# Altium PCB PCB EN 15.PcbDoc
Units mm, origin at the board's own origin, x right, y up, seen from the top; angles counter-clockwise.
Board outline 60 x 50 mm, 2 copper layers (Top Layer, Bottom Layer); 21 components, 10 nets, 49 pads, 0 vias.
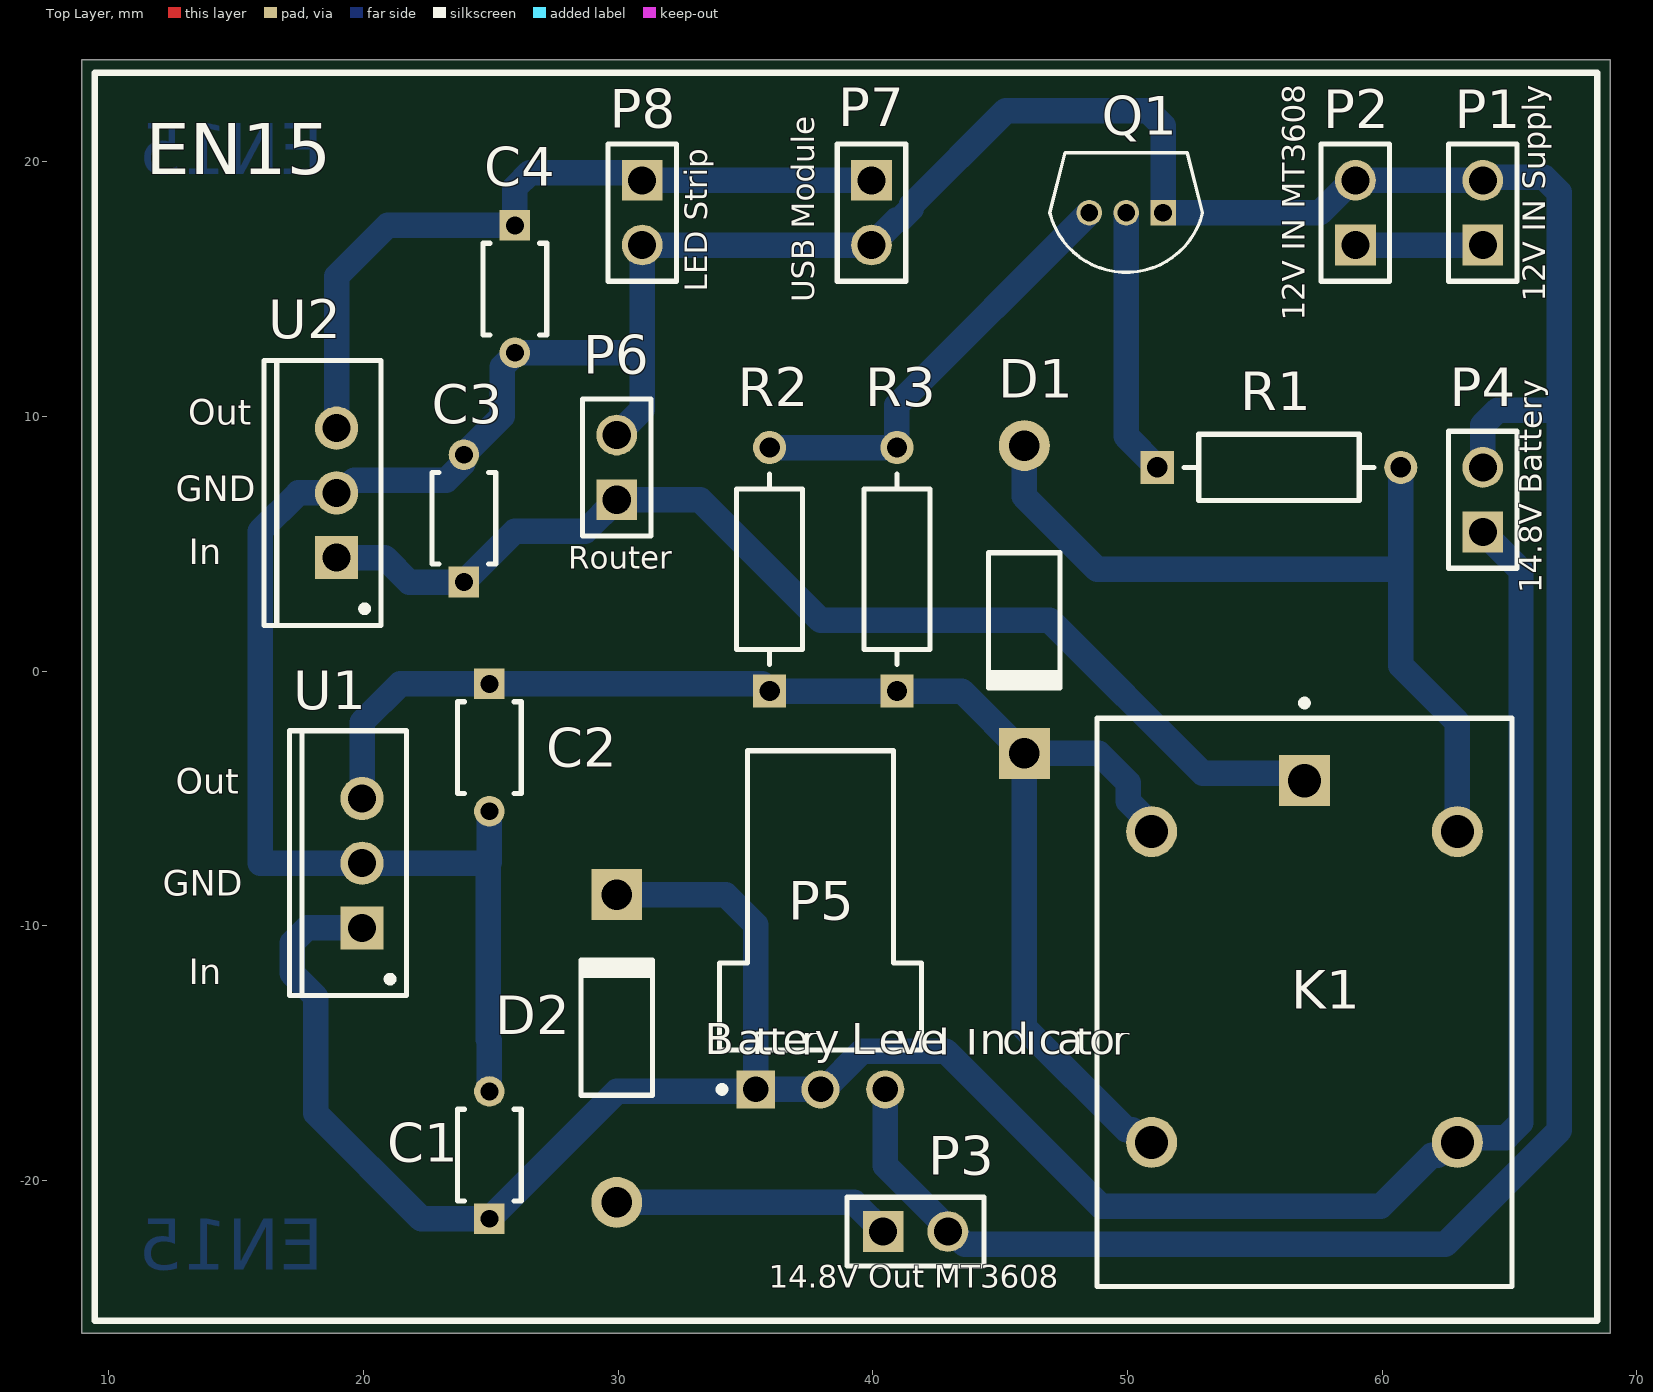
[diagram p0: Top Layer view]
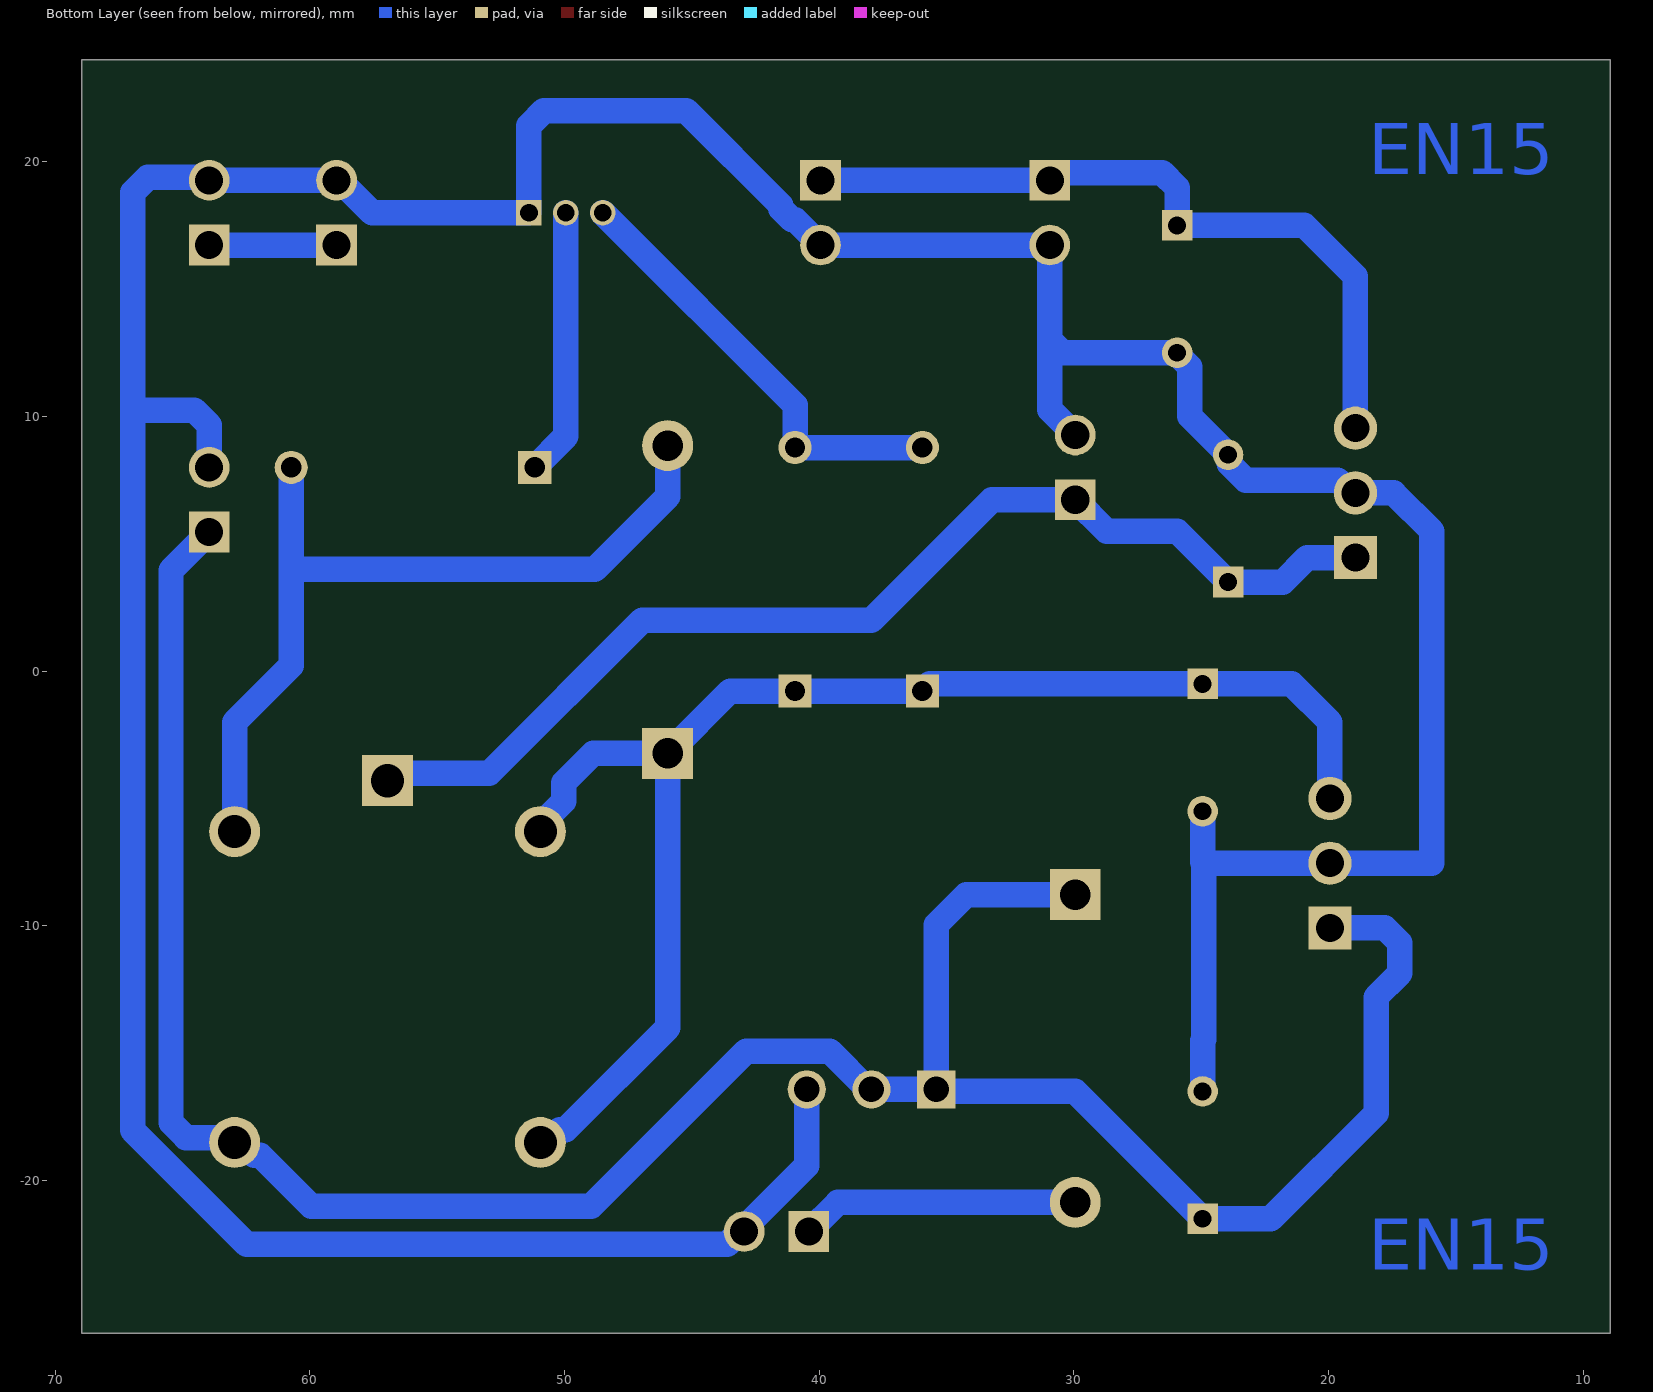
[diagram p1: Bottom Layer view, seen from below]
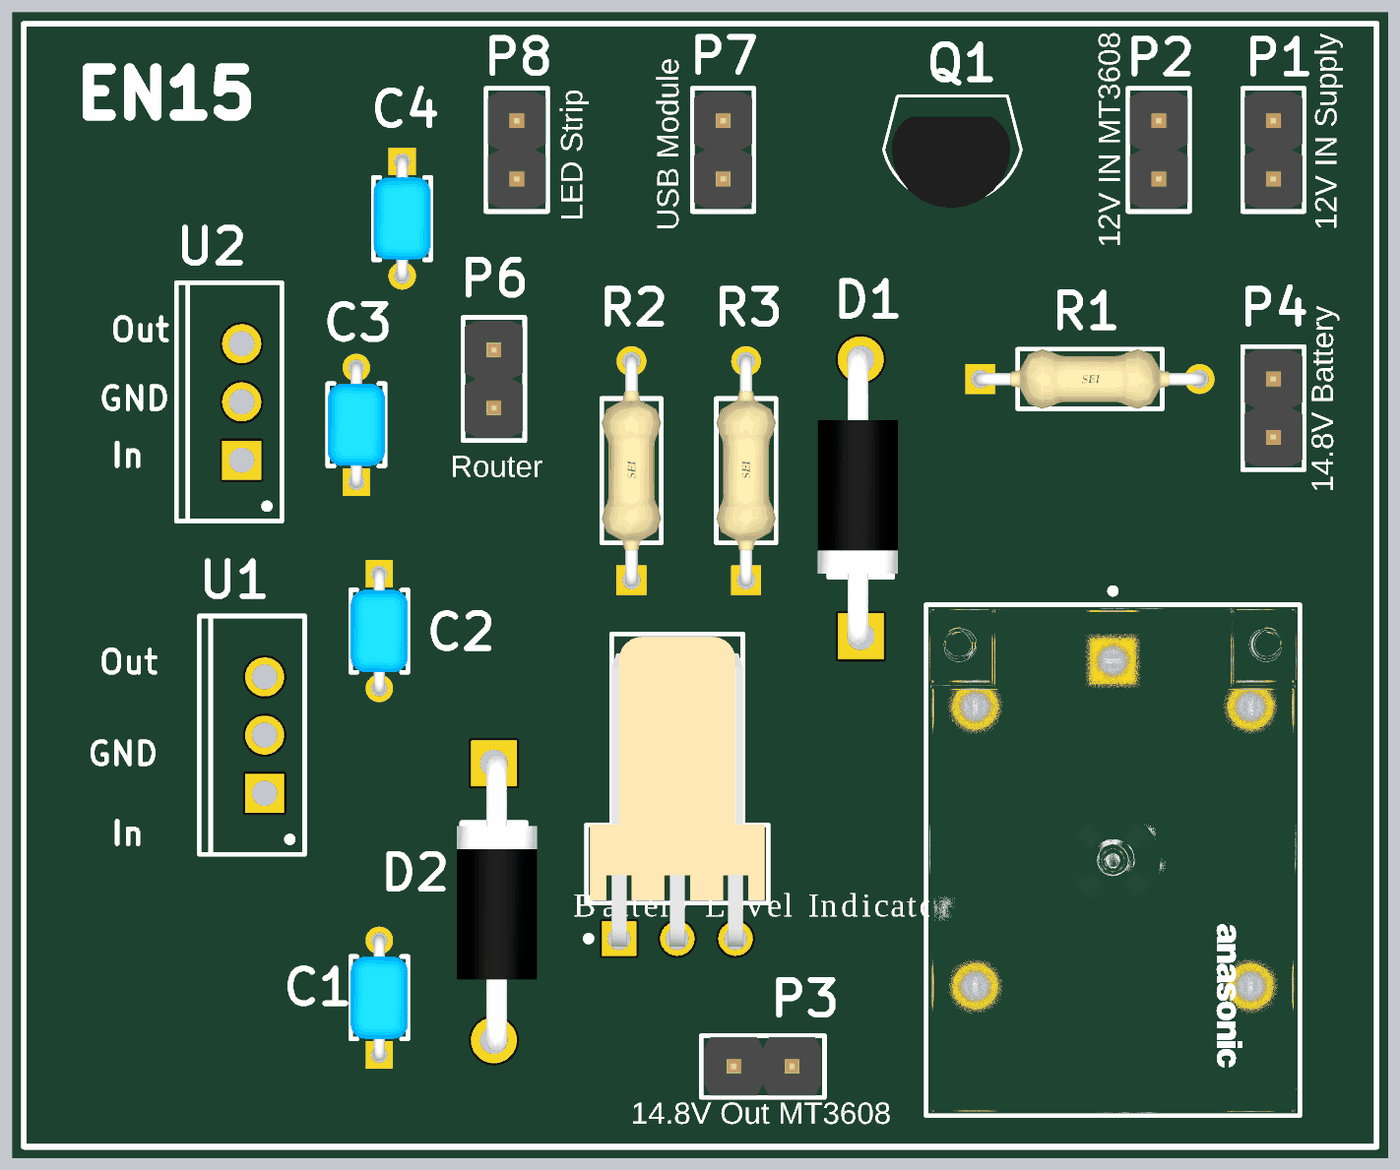
[diagram p2: 3D render of the assembled board from above, using the file's embedded part models]

## Layer stack, top to bottom
Top Solder: solder mask 0.0102, Solder Resist, Dk 3.5
Top Layer: signal copper 0.0356
Dielectric 1: dielectric 0.32, FR-4, Dk 4.8
Bottom Layer: signal copper 0.0356
Bottom Solder: solder mask 0.0102, Solder Resist, Dk 3.5

## Board outline
8.95,-26 68.95,-26 68.95,24 8.95,24

## Design rules (kind name [scope] priority, off if disabled: settings)
Clearance [All] p1: gap=0.254 ignorepadtopadclearanceinfootprint=FALSE except(0: Arc-Hole Track-Hole SMDPad-Hole THPad-Hole Via-Hole Fill-Hole Poly-Hole Region-Hole Text-Hole)
MinimumSolderMaskSliver [All] p1: minsoldermaskwidth=0.1
PolygonConnect [All] p1: connectstyle=Relief reliefconductorwidth=0.254 reliefentries=4 polygonreliefangle="90 Angle" airgapwidth=0.254
RoutingVias [All] p1: holewidth=0.711 width=1.27 viastyle="Through Hole" minholewidth=0.711 minwidth=1.27 maxholewidth=0.711 maxwidth=1.27
SolderMaskExpansion [All] p1: expansion=0.102 istentingtop=FALSE
Width [All] p1: maxlimit=2 minlimit=0.254 preferedwidth=0.254
29 further rules are at their usual default settings.

## Components (designator, comment, footprint, x,y, rotation, side; value= is the part's Value field where it differs from the comment)
C1 "104" FP-RCE0K1-MFG 24.95,-19 r90 top
C2 "104" FP-RCE0K1-MFG 24.95,-3 r270 top
C3 "104" FP-RCE0K1-MFG 23.95,6 r90 top
C4 "104" FP-RCE0K1-MFG 25.95,15 r270 top
D1 "Diode 1N4001" DO-41 45.95,2 r270 top
D2 "Diode 1N4001" DO-41 29.95,-14 r90 top
K1 "Relay" FP-JS1-5V-F-MFG 56.95,-13 r270 top
P1 "12V IN Supply" 61300211121 63.95,18 r90 top
P2 "12V IN MT3608" 61300211121 58.95,18 r90 top
P3 "14.8V Out MT3608" 61300211121 41.68,-22 r0 top
P4 "14.8V Battery" 61300211121 63.95,6.73 r90 top
P5 "Battery Level Indicator" 61900319521 37.95,-9 r180 top
P6 "Router" 61300211121 29.95,8 r90 top
P7 "USB Module" 61300211121 39.95,18 r270 top
P8 "LED Strip" 61300211121 30.95,18 r270 top
Q1 "2SD400" TO145P470X600X850-3P 49.95,18 r270 top
R1 "PCF14JT7K50" FP-CF14-MFG 55.95,8 r0 top
R2 "PCF14JT7K50" FP-CF14-MFG 35.95,4 r90 top
R3 "PCF14JT7K50" FP-CF14-MFG 40.95,4 r90 top
U1 "L7812CV" TO220 19.95,-7.54 r90 top
U2 "L7805CV" TO220 18.95,7 r90 top

## Footprints (in the part's own frame and the unit in brackets; to place one, negate y for a bottom-side part, rotate by r counter-clockwise, add the part's x,y. Pads: shape width x height; smd on the part's side, far side on the other; paste and mask are expansions set on the pad)
61300211121 [mm] "Pin Header, pitch 2.54 mm, THT, Vertical, single row, 2p"
  rect 1.6x1.6 hole 1.1: 1(-1.27,0)
  round 1.6 hole 1.1: 2(1.27,0)
  silkscreen extent -2.69,-1.35 2.69,1.35, body extent -2.54,-1.27 2.54,1.27, height 8.57
61900319521 [mm] "2.54mm Male Right Angled Locking Header Top Locking, 3p"
  rect 1.5x1.5 hole 1: 1(2.54,7.42)
  round 1.5 hole 1: 2(0,7.42) 3(-2.54,7.42)
  silkscreen extent -3.96,-5.87 3.99,7.54, body extent -3.81,-5.75 3.81,7.77, height 5.83
DO-41 [mm] "Diode, Axial; Body 5.2 x 2.7 mm (LxDia. max), Lead Dia. 0.86 mm (max)"
  round 2 hole 1.2: 1(-6.858,0)
  rect 2x2 hole 1.2: 2(5.23,0)
  silkscreen extent -2.65,-1.4 2.75,1.4, body extent -7.31,-1.88 5.59,1.62, height 3.75
FP-CF14-MFG [mm]
  rect 1.3x1.3 hole 0.8 paste-1000 mask+0: 1(-4.78,0)
  round 1.3 hole 0.8 paste-1000 mask+0: 2(4.78,0)
  silkscreen extent -3.73,-1.3 3.73,1.3, body extent -5.53,-1.4 5.53,1.4, height 0.25
FP-JS1-5V-F-MFG [mm]
  rect 2x2 hole 1.3 paste-1000 mask+0: 1(-8.7,0)
  round 2 hole 1.3 paste-1000 mask+0: 2(-6.7,-6) 3(5.5,-6) 4(5.5,6) 5(-6.7,6)
  silkscreen extent -11.87,-8.15 11.15,8.15, body extent -11.25,-8.25 11.25,8.25, height 0.25
FP-RCE0K1-MFG [mm]
  rect 1.2x1.2 hole 0.7 paste-1000 mask+0: 1(-2.5,0)
  round 1.2 hole 0.7 paste-1000 mask+0: 2(2.5,0)
  silkscreen extent -1.8,-1.25 1.8,1.25, body extent -3.2,-1.35 3.2,1.35, height 0.25
TO145P470X600X850-3P [mm]
  rect 1x1 hole 0.7: 1(0,1.45)
  round 1 hole 0.7: 2(0,0) 3(0,-1.45)
  silkscreen extent -2.35,-3 2.34,3, body extent -1.46,-2.66 2.54,2.54, height 7.3
TO220 [mm] "TO, Thru-Hole, Vertical, Heatsink Mounted; 3 In-Line Leads; Pitch 2.54 mm"
  rect 1.7x1.7 hole 1.1: 1(-2.54,0)
  round 1.7 hole 1.1: 2(0,0) 3(2.54,0)
  silkscreen extent -5.2,-1.75 5.2,2.85, body extent -5.25,-1.8 5.25,2.9, height 19.7

## Part data
C1 C2 C3 C4: library part CMP-06035-043061-1, "Cap Ceramic 1pF 100V C0G ±0.25pF Radial 5mm +125°C Automotive Bulk", Capacitance=1pF, Case/Package=Radial, Dielectric=C0G, Max Operating Temperature=125°C, Min Operating Temperature=-55°C, Package Quantity=2000, Ratings=AEC-Q200, Resistor Type=Ceramic, Voltage Rating=100V, Height=3.5mm, Height - Seated (Max)=0.138inch, Lead Diameter=0.5mm, Lead Pitch=0.197inch, Lead/Base Style="Formed Leads", Length=0.142inch, Mount="Through Hole", Packaging="Tape and Reel", Termination=Radial, Voltage Rating (DC)=100V, Width=0.098inch
D1 D2: "1 Amp General Purpose Rectifier", Code_JEDEC=DO-204-AL, ComponentLink1Description="Manufacturer Link", ComponentLink1URL=http://www.fairchildsemi.com/, ComponentLink2Description=Datasheet, ComponentLink2URL=http://www.fairchildsemi.com/ds/1N%2F1N4001.pdf, DatasheetVersion=1998, LatestRevisionDate=17-Jul-2002, LatestRevisionNote="Re-released for DXP Platform.", PackageDescription="Diode, Axial; Body 5.2 x 2.7 mm (LxDia. max), Lead Dia. 0.86 mm (max)", PackageReference=DO-41, PackageVersion=Aug-1999, Published=8-Jun-2000, Publisher="Altium Limited"
K1: library part CMP-05606-000016-1, "RELAY GEN PURPOSE SPDT 10A 5V", Ambient Temperature Range High=+70°C, Ambient Temperature Range Low=-40°C, Coil Current=72mA, Coil Power=360mW, Coil Resistance=69.4Ω, Coil Voltage=5V, Manufacturer=Panasonic, Manufacturer Part Number=JS1-5V-F, Switching Current=10A, Switching Power=150W, Temperature="-40°C to +70°C", Automotive=No, Category=Relay, Coil Type=Non-Latching, ComponentLink2Description=Datasheet, ComponentLink2URL=https://www3.panasonic.biz/ac/e_download/control/relay/power/catalog/mech_eng_js.pdf?via=ok, Device Class L1=Electromechanical, Device Class L2=Relays, Device Class L3="Power Relays", Digikey Description="RELAY GEN PURPOSE SPDT 10A 5V", Height=16.8mm, Lead Free=Yes, Mouser Description="JS Series 10 A SPDT 5 V Through Hole Sealed Miniature Non-Polarized Power Relay", Number Of Contacts=1, Octopart=https://octopart.com/js1-5v-f-panasonic-39428621, Package=JS1-5V-F, RoHS=TRUE, Standoff Height=0.3mm, Temperature Range High=+70°C, Temperature Range Low=-40°C, Throw Configuration=SPDT
P1 P2 P3 P4 P6 P7 P8: library part CMP-1712-00002-4, "THT Vertical Pin Header WR-PHD, Pitch 2.54 mm, Single Row, 2 pins", Contact Resistance=20mOhm, Manufacturer="Wurth Elektronik", Operating Temperature=-40to105degC, Package Reference=61300211121, Rated Current=3A, Withstanding Voltage=500VAC, Working Voltage=250VAC, Datasheet URL=https://katalog.we-online.de/em/datasheet/6130xx11121.pdf, Gender=Male, Manufacturer URL=http://www.we-online.de, Mounting Technology=THT, Orientation=Vertical, Packaging=Bag, Part Number=61300211121, Pin Number=2, Pitch=2.54mm, Publisher=WurthElektronik, Row Number=Single
P5: library part CMP-1502-00600-1, "Male Top Locking Header WR-WTB, THT, Right Angled, pitch 2.54 mm, 1 x 3 position", Contact Resistance=20mOhm, Manufacturer="Wurth Elektronik", Operating Temperature=-40to105degC, Package Reference=61900319521, Working Voltage=250VAC, Datasheet URL=https://katalog.we-online.de/em/datasheet/6190xx19521.pdf, Gender=Male, Manufacturer URL=http://www.we-online.de, Mounting Technology=THT, Orientation=RightAngled, Packaging=Bag, Part Number=61900319521, Pitch=2.54mm, Position=1x3, Publisher=WurthElektronik
Q1: "Connector Header Through Hole 20 position 0.100 _2.54mm_", Package=None, Availability=Unavailable, MF="Samtec Inc.", MP=2SD400, Price=None, SnapEDA_Link=https://www.snapeda.com/parts/2SD400/Samtec%20Inc./view-part/627662/?ref=snap
R1: library part CMP-26528-000003-1, "RES 7.5K OHM 1/4W 5% AXIAL", Case/Package=Axial, Max Operating Temperature=155°C, Max Power Dissipation=250mW, Min Operating Temperature=-55°C, Resistance=220R, Resistor Type="Carbon Film", Temperature Coefficient=-400ppm/°C, Tolerance=5%, Contact Plating=Tin, Diameter=2.3mm, Features="Flame Retardant Coating", Lead Free="Lead Free", Length=0.256inch, Mount="Through Hole", Number of Terminations=2, Packaging="Tape and Reel", Power Rating=250mW, Radiation Hardening=No, RoHS Compliant=Yes, Series=CF
R2 R3: library part CMP-26528-000003-1, "RES 7.5K OHM 1/4W 5% AXIAL", Case/Package=Axial, Max Operating Temperature=155°C, Max Power Dissipation=250mW, Min Operating Temperature=-55°C, Resistance=7.5K, Resistor Type="Carbon Film", Temperature Coefficient=-400ppm/°C, Tolerance=5%, Contact Plating=Tin, Diameter=2.3mm, Features="Flame Retardant Coating", Lead Free="Lead Free", Length=0.256inch, Mount="Through Hole", Number of Terminations=2, Packaging="Tape and Reel", Power Rating=250mW, Radiation Hardening=No, RoHS Compliant=Yes, Series=CF
U1: library part CMP-0244-00450-1, "Positive Voltage Regulator, 12V, 3-Pin TO-220", ComponentLink1Description="Manufacturer URL", ComponentLink1URL=http://www.st.com, ComponentLink2Description=Datasheet, ComponentLink2URL=http://www.st.com/internet/com/TECHNICAL_RESOURCES/TECHNICAL_LITERATURE/DATASHEET/CD00000444.pdf, ComponentLink3Description="Package Specification", ComponentLink3URL=http://www.st.com/internet/com/TECHNICAL_RESOURCES/TECHNICAL_LITERATURE/PACKAGE_INFORMATION/CD00004649.pdf, DatasheetVersion=16/11/2011, PackageDescription="TO, Thru-Hole, Vertical, Heatsink Mounted; 3 In-Line Leads; Pitch 2.54 mm", PackageReference=TO220, PackageVersion=ver3.0
U2: library part CMP-0244-00483-1, "Positive Voltage Regulator, 5V, 3-Pin TO-220", ComponentLink1Description="Manufacturer URL", ComponentLink1URL=http://www.st.com, ComponentLink2Description=Datasheet, ComponentLink2URL=http://www.st.com/internet/com/TECHNICAL_RESOURCES/TECHNICAL_LITERATURE/DATASHEET/CD00000444.pdf, ComponentLink3Description="Package Specification", ComponentLink3URL=http://www.st.com/internet/com/TECHNICAL_RESOURCES/TECHNICAL_LITERATURE/PACKAGE_INFORMATION/CD00004649.pdf, DatasheetVersion=16/11/2011, PackageDescription="TO, Thru-Hole, Vertical, Heatsink Mounted; 3 In-Line Leads; Pitch 2.54 mm", PackageReference=TO220, PackageVersion=ver3.0

## Nets (pads, with @x,y where several pads share a name; then routed paths per layer and width w, separated by ;. In a path a pad name is that pad's centre, name@x,y a point inside that pad or via, vN(x,y) a via of type N, cw(c..) or ccw(c..) an arc to the next point about the centre after c; other vN are vias at no path point)
+12: P1.1 P2.1 | length 5
  Bottom Layer w1: P2.1 P1.1
+14V8: C1.1 D2.2 K1.4 P4.1 P5.1 P5.2 U1.1 | length 101.9
  Bottom Layer w1: U1.1 17.79,-10.08 17.204,-10.666 17.204,-11.862 18.139,-12.797 18.139,-17.362 22.277,-21.5 C1.1 29.95,-16.5 35.33,-16.5 P5.1 ; D2.2 34.22,-8.77 35.41,-9.96 P5.1 ; P4.1 65.45,3.96 65.45,-17.723 64.864,-18.309 63.141,-18.309 K1.4 62.679,-18.5 62.179,-19 61.95,-19 59.95,-21 48.95,-21 42.866,-14.916 39.589,-14.916 38.085,-16.42 P5.2 P5.1
GND: C1.2 C2.2 C3.2 C4.2 P1.2 P2.2 P3.2 P4.2 P5.3 P6.2 P7.2 P8.2 Q1.1 U1.2 U2.2 | length 177.5
  Bottom Layer w1: U1.2 15.95,-7.54 15.95,5.5 17.45,7 19.139,7 19.639,7.5 23.264,7.5 23.912,8.148 23.912,8.462 25.45,10 25.45,11.946 25.95,12.446 C4.2 30.45,12.5 30.95,13 ; U1.2@19.953,-7.537 24.91,-7.537 ; C1.2 24.95,-14.5 24.91,-14.46 24.91,-7.537 ; C2.2 24.95,-7.497 24.91,-7.537 ; P6.2 30.95,10.27 30.95,13 ; P5.3 40.49,-19.414 42.95,-21.874 P3.2 43.112,-22 43.612,-22.5 62.481,-22.5 66.95,-18.031 66.95,10.25 ; P4.2 63.95,9.664 64.536,10.25 66.95,10.25 ; 30.95,13 P8.2 P7.2 40.936,17.716 41.062,17.716 41.504,18.158 41.504,18.284 45.22,22 50.814,22 51.4,21.414 Q1.1 57.554,18 58.824,19.27 P2.2 P1.2 64.065,19.385 66.364,19.385 66.95,18.799 66.95,10.25
NetC2_1: C2.1 D1.2 K1.2 K1.3 R2.1 R3.1 U1.3 | length 55.2
  Bottom Layer w1: U1.3 19.95,-2 21.45,-0.5 35.67,-0.5 R2.1 R3.1 43.5,-0.78 D1.2 ; K1.3 50.679,-18.5 50.179,-18 49.95,-18 45.95,-14 D1.2 ; K1.2 50.95,-6.029 50.036,-5.115 50.036,-4.386 48.88,-3.23 D1.2
NetC3_1: C3.1 K1.1 P6.1 U2.1 | length 44.3
  Bottom Layer w1: U2.1 20.84,4.46 21.8,3.5 C3.1 25.95,5.5 28.72,5.5 P6.1 33.22,6.73 37.95,2 46.95,2 52.95,-4 56.65,-4 K1.1
NetC4_1: C4.1 P7.1 P8.1 U2.3 | length 29.6
  Bottom Layer w1: U2.3 18.95,15.5 20.95,17.5 C4.1 25.95,18.984 26.536,19.57 30.65,19.57 P8.1 P7.1
NetD1_1: D1.1 K1.5 R1.2 | length 33.2
  Bottom Layer w1: D1.1 45.95,6.858 48.808,4 60.73,4 ; R1.2 60.73,4 ; K1.5 62.95,-2 60.73,0.22 60.73,4
NetD2_1: D2.1 P3.1 | length 10.9
  Bottom Layer w1: D2.1 39.268,-20.858 P3.1
NetQ1_2: Q1.2 R1.1 | length 10.5
  Bottom Layer w1: Q1.2 49.95,9.22 R1.1
NetQ1_3: Q1.3 R2.2 R3.2 | length 17.3
  Bottom Layer w1: R2.2 R3.2 40.95,10.45 Q1.3

## Other copper
Bottom Layer:
  text "EN15" at 18.45,19.5 h2
  text "EN15" at 18.45,-23.5 h2

## Silkscreen, mask and mechanical layers (free items; w line width, h text height)
Top Overlay:
  region: 32.16,-15.463
  region: 32.16,-15.463
  lines w0.254: 9.45,-25.5 9.45,23.5 68.45,23.5 68.45,-25.5 9.45,-25.5
  text "EN15" at 11.45,19.5 h2
  text "LED Strip" at 33.8,14.9 h1.52 r90
  text "USB Module" at 38,14.475 h1.52 r90
  text "12V IN Supply" at 66.7,14.5 h1.52 r90
  text "12V IN MT3608" at 57.25,13.75 h1.52 r90
  text "Out" at 13.13,9.68 h1
  text "GND" at 12.63,6.68 h1
  text "In" at 13.15,4.2 h1
  text "Router" at 28.05,3.725 h1.52
  text "14.8V Battery" at 66.55,3.05 h1.52 r90
  text "Out" at 12.63,-4.82 h1
  text "GND" at 12.13,-8.82 h1
  text "In" at 13.15,-12.3 h1
  text "B" at 33.414,-15.45 h2.09
  text "a" at 34.671,-15.45 h2.09
  text "t" at 35.39,-15.45 h2.09
  text "t" at 35.929,-15.45 h2.09
  text "e" at 36.468,-15.45 h2.09
  text "r" at 37.186,-15.45 h2.09
  text "y" at 37.725,-15.45 h2.09
  text "L" at 39.162,-15.45 h2.09
  text "e" at 40.24,-15.45 h2.09
  text "v" at 40.958,-15.45 h2.09
  text "e" at 41.856,-15.45 h2.09
  text "l" at 42.575,-15.45 h2.09
  text "I" at 43.653,-15.45 h2.09
  text "n" at 44.192,-15.45 h2.09
  text "d" at 45.09,-15.45 h2.09
  text "i" at 45.988,-15.45 h2.09
  text "c" at 46.527,-15.45 h2.09
  text "a" at 47.245,-15.45 h2.09
  text "t" at 47.964,-15.45 h2.09
  text "o" at 48.503,-15.45 h2.09
  text "r" at 49.401,-15.45 h2.09
  text "14.8V Out MT3608" at 35.925,-24.5 h1.52